# EAGLE board MCDB (EAGLE 9.4.2)
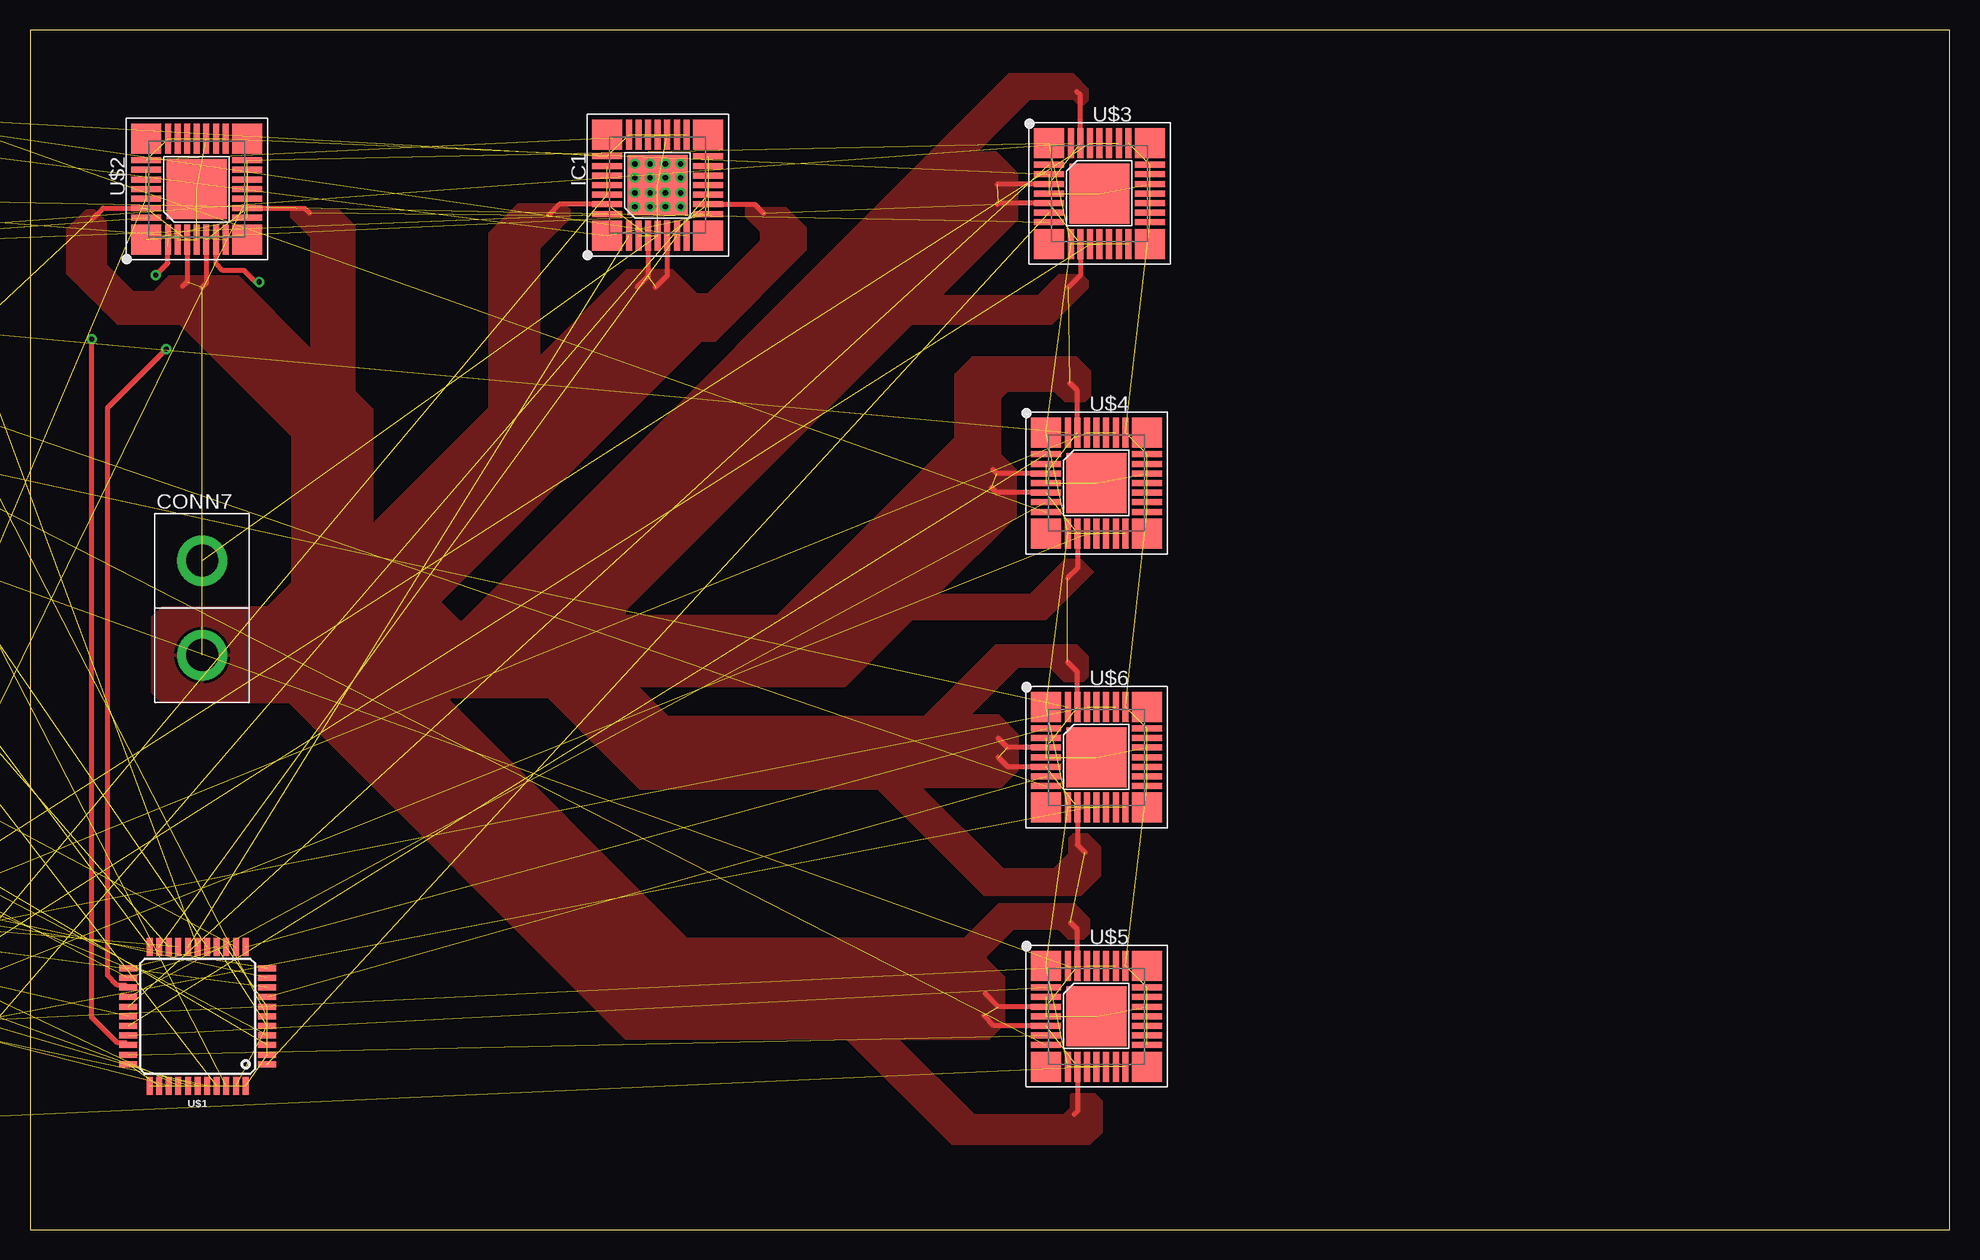
[diagram p0: board, top side]
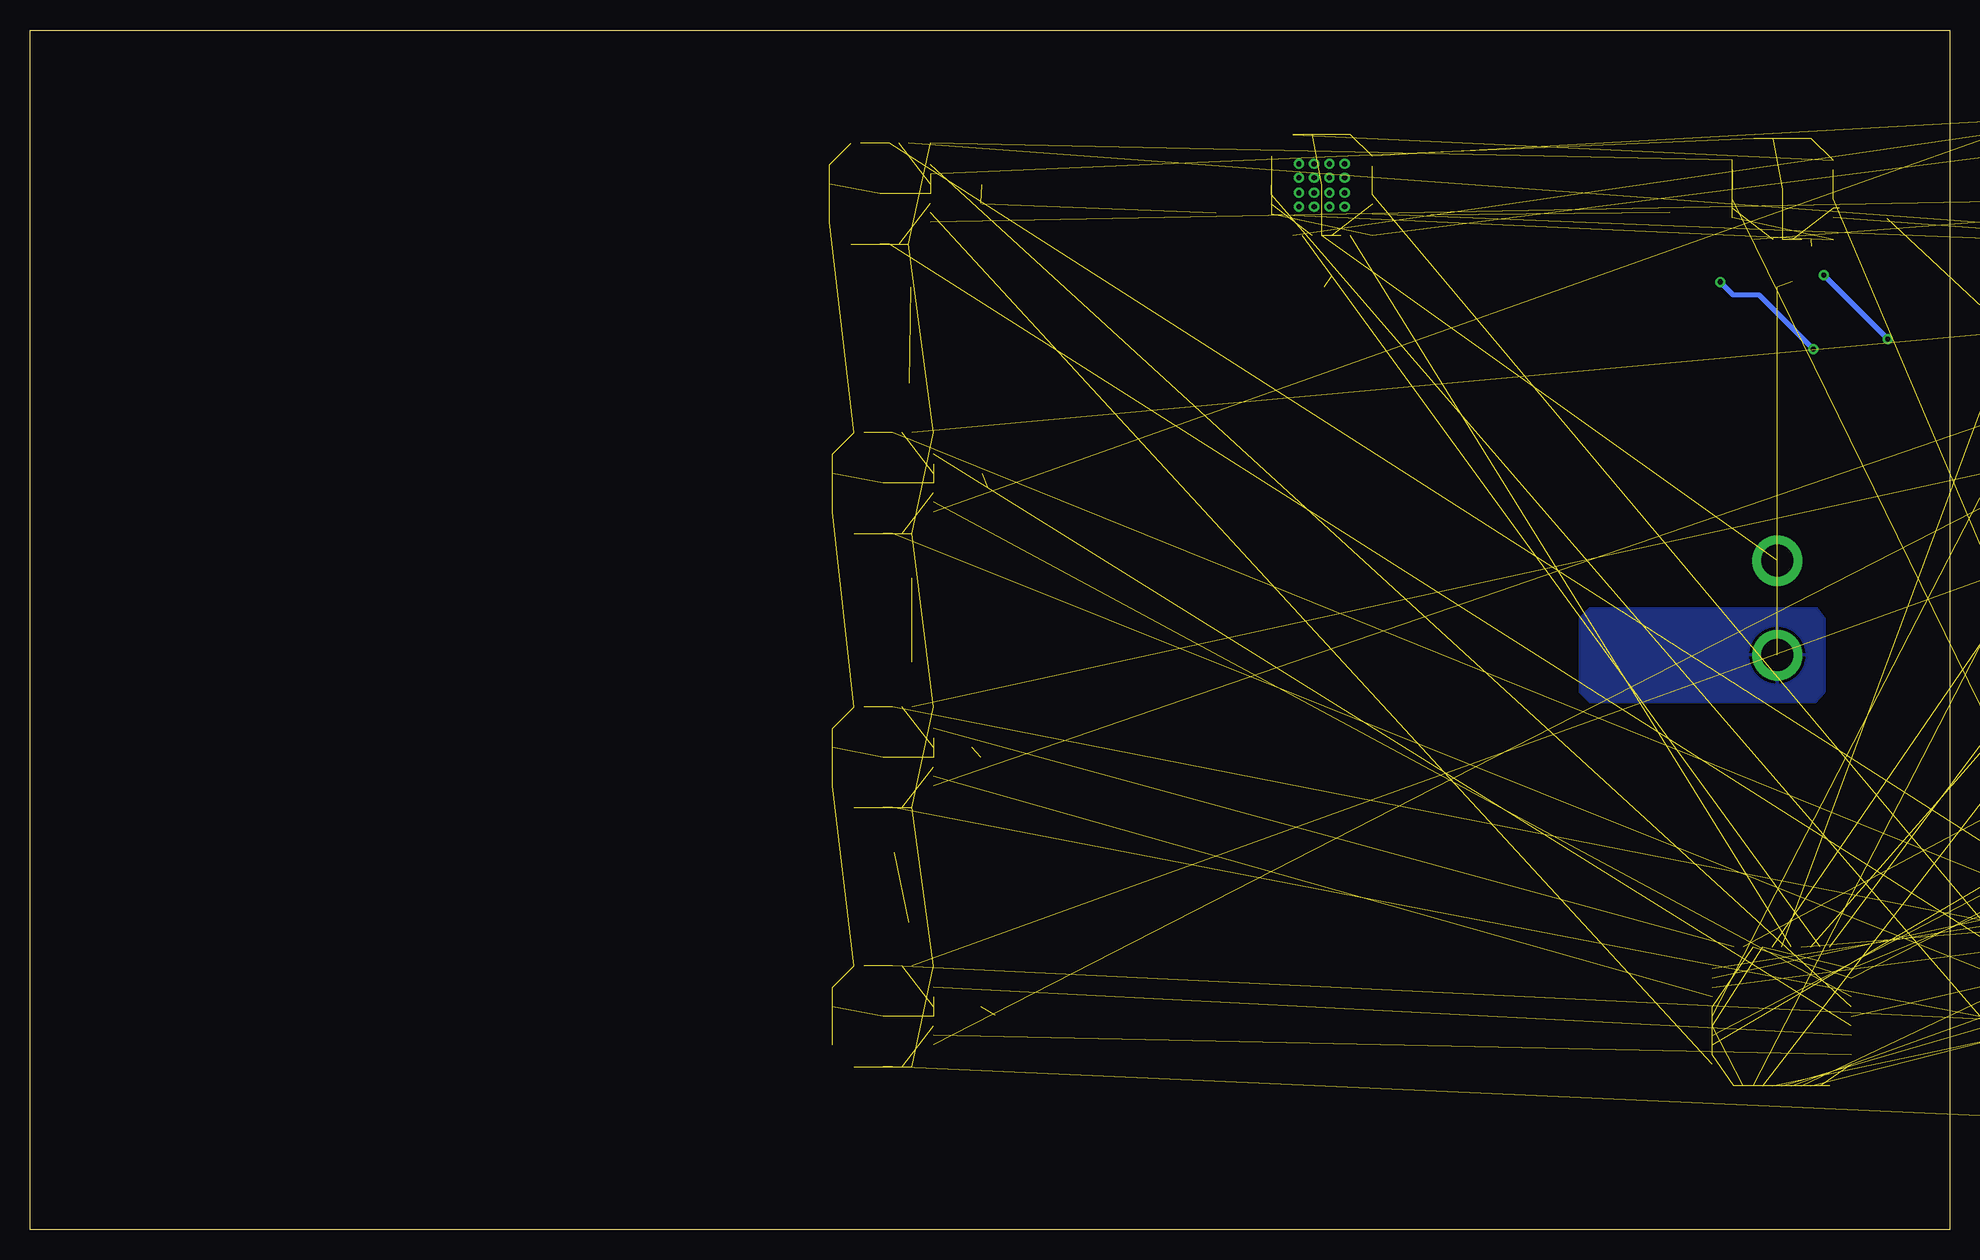
[diagram p1: board, bottom side, seen from below]

Size 160 x 100 mm. Coordinates in mm from the lower left corner, seen from the top.
Outline: 0,0 160,0 160,100 0,100 0,0
Copper layers (1*16): Top 0.035mm / dielectric 1.5mm / Bottom 0.035mm
Design rules "default": minimum track width 6mil, minimum drill 0.35mm, track to track 6mil, track to pad 6mil, pad to pad 6mil, via to via 6mil, smd to smd 6mil, copper to edge 40mil, drill to drill 6mil, minimum pad ring 10mil, minimum via ring 8mil, stop-mask expansion 4mil, vias tented up to drill 0mil, thermal gap 10mil

## Footprints (pad centres in the part's own frame; a part is rotated, then mirrored left to right if it is on the bottom)
0603-CAP = smd 1.1 x 1: 1 -0.85,0; 2 0.85,0
.248"CAP_THRU = drill 0.8: MINUS 0,0; PLUS 2.5,0
ANDERSON_VERTICAL = drill 2.667 pad 4.191: PIN1 0,-3.937; PIN2 0,3.937
1X04-MTA = drill 1.016 pad 1.88: 1 -3.81,0; 2 -1.27,0; 3 1.27,0; 4 3.81,0
PQFN-32 = smd 2.5 x 2.5: 1 -4.2,4.2; 9 -4.2,-4.2; 17 4.2,-4.2; 25 4.2,4.2 | smd 2.5 x 0.5: 2 -4.2,2.4; 3 -4.2,1.6; 4 -4.2,0.8; 5 -4.2,0; 6 -4.2,-0.8; 7 -4.2,-1.6; 8 -4.2,-2.4; 18 4.2,-2.4; 19 4.2,-1.6; 20 4.2,-0.8; 21 4.2,0; 22 4.2,0.8; 23 4.2,1.6; 24 4.2,2.4 | smd 0.5 x 2.5: 10 -2.4,-4.2; 11 -1.6,-4.2; 12 -0.8,-4.2; 13 0,-4.2; 14 0.8,-4.2; 15 1.6,-4.2; 16 2.4,-4.2; 26 2.4,4.2; 27 1.6,4.2; 28 0.8,4.2; 29 0,4.2; 30 -0.8,4.2; 31 -1.6,4.2; 32 -2.4,4.2 | smd 5 x 5: MID 0,0
USB-B-PTH = drill 0.914 pad 1.676: D+ 4,1.25; D- 5.981,1.25; GND 4,-1.25; VBUS 5.981,-1.25 | drill 2.286: SHLD1 1.282,-6.02; SHLD2 1.282,6.02
LED-1206 = smd 1.2 x 1.4: A -1.5,0; C 1.5,0
4X-0603 = smd 0.65 x 0.8: 1 0,-0.05; 4 2.55,-0.05; 5 2.55,1.65; 8 0,1.65 | smd 0.55 x 0.8: 2 0.875,-0.05; 3 1.675,-0.05; 6 1.675,1.65; 7 0.875,1.65
R0603 = smd 1 x 1.1: 1 -0.85,0; 2 0.85,0
TQFP44 = smd 1.5 x 0.5: 1 -5.8,4; 2 -5.8,3.2; 3 -5.8,2.4; 4 -5.8,1.6; 5 -5.8,0.8; 6 -5.8,0; 7 -5.8,-0.8; 8 -5.8,-1.6; 9 -5.8,-2.4; 10 -5.8,-3.2; 11 -5.8,-4; 23 5.8,-4; 24 5.8,-3.2; 25 5.8,-2.4; 26 5.8,-1.6; 27 5.8,-0.8; 28 5.8,0; 29 5.8,0.8; 30 5.8,1.6; 31 5.8,2.4; 32 5.8,3.2; 33 5.8,4 | smd 0.5 x 1.5: 12 -4,-5.8; 13 -3.2,-5.8; 14 -2.4,-5.8; 15 -1.6,-5.8; 16 -0.8,-5.8; 17 0,-5.8; 18 0.8,-5.8; 19 1.6,-5.8; 20 2.4,-5.8; 21 3.2,-5.8; 22 4,-5.8; 34 4,5.8; 35 3.2,5.8; 36 2.4,5.8; 37 1.6,5.8; 38 0.8,5.8; 39 0,5.8; 40 -0.8,5.8; 41 -1.6,5.8; 42 -2.4,5.8; 43 -3.2,5.8; 44 -4,5.8
USB-MICRO-AB-VERT = drill 0.5 pad 0.7: P$1 -1.3,0.5; P$2 -0.65,-0.5; P$3 0,0.5; P$4 0.65,-0.5; P$5 1.3,0.5 | drill 1.175: P$6 -3.575,0.28; P$7 3.575,0.28
CRYSTAL-SMD-7.6X4.1-2PIN = smd 5.5 x 1.5: P$1 0,0; P$2 7.8,0

## Placement (x,y rotation side)
C1  33 nF  [0603-CAP]  -48.26,80.01 0 top  (outside the outline)
C2  100 nF  [0603-CAP]  -78.74,71.12 0 top  (outside the outline)
C3  1 uF  [0603-CAP]  -34.29,86.36 0 top  (outside the outline)
C4  100 uF  [.248"CAP_THRU]  -24.13,58.42 0 top  (outside the outline)
C5  33 nF  [0603-CAP]  -54.61,80.01 0 top  (outside the outline)
C6  100 nF  [0603-CAP]  -11.43,80.01 0 top  (outside the outline)
C7  1 uF  [0603-CAP]  -39.37,86.36 0 top  (outside the outline)
C8  100 uF  [.248"CAP_THRU]  -33.02,58.42 0 top  (outside the outline)
C9  33 nF  [0603-CAP]  -60.96,80.01 0 top  (outside the outline)
C10  100 nF  [0603-CAP]  -19.05,80.01 0 top  (outside the outline)
C11  1 uF  [0603-CAP]  -44.45,86.36 0 top  (outside the outline)
C12  100 uF  [.248"CAP_THRU]  -41.91,58.42 0 top  (outside the outline)
C13  33 nF  [0603-CAP]  -67.31,80.01 0 top  (outside the outline)
C14  100 nF  [0603-CAP]  -26.67,80.01 0 top  (outside the outline)
C15  1 uF  [0603-CAP]  -49.53,86.36 0 top  (outside the outline)
C16  100 uF  [.248"CAP_THRU]  -50.8,58.42 0 top  (outside the outline)
C17  33 nF  [0603-CAP]  -73.66,80.01 0 top  (outside the outline)
C18  100 nF  [0603-CAP]  -34.29,80.01 0 top  (outside the outline)
C19  1 uF  [0603-CAP]  -54.61,86.36 0 top  (outside the outline)
C20  100 uF  [.248"CAP_THRU]  -59.69,58.42 0 top  (outside the outline)
C21  33 nF  [0603-CAP]  -80.01,80.01 0 top  (outside the outline)
C22  100 nF  [0603-CAP]  -41.91,80.01 0 top  (outside the outline)
C23  1 uF  [0603-CAP]  -59.69,86.36 0 top  (outside the outline)
C24  100 uF  [.248"CAP_THRU]  -68.58,58.42 0 top  (outside the outline)
C25  22 pF  [0603-CAP]  -10.16,86.36 0 top  (outside the outline)
C26  22pF  [0603-CAP]  -29.21,86.36 0 top  (outside the outline)
C27  .1 uF  [0603-CAP]  -22.86,86.36 0 top  (outside the outline)
C28  1 uF  [0603-CAP]  -64.77,86.36 0 top  (outside the outline)
C29  [0603-CAP]  -49.53,91.44 0 top  (outside the outline)
C30  [0603-CAP]  -54.61,91.44 0 top  (outside the outline)
C31  [0603-CAP]  -59.69,91.44 0 top  (outside the outline)
C32  [0603-CAP]  -64.77,91.44 0 top  (outside the outline)
C33  [0603-CAP]  -69.85,91.44 0 top  (outside the outline)
C34  [0603-CAP]  -74.93,91.44 0 top  (outside the outline)
C35  [0603-CAP]  -80.01,91.44 0 top  (outside the outline)
C36  [0603-CAP]  -85.09,91.44 0 top  (outside the outline)
C37  [.248"CAP_THRU]  -11.43,71.12 0 top  (outside the outline)
C38  [.248"CAP_THRU]  -20.32,71.12 0 top  (outside the outline)
C39  [.248"CAP_THRU]  -29.21,71.12 0 top  (outside the outline)
CONN1  ANDERSONVERTICAL  [ANDERSON_VERTICAL]  -11.43,11.43 0 top  (outside the outline)
CONN2  ANDERSONVERTICAL  [ANDERSON_VERTICAL]  -20.32,11.43 0 top  (outside the outline)
CONN3  ANDERSONVERTICAL  [ANDERSON_VERTICAL]  -29.21,11.43 0 top  (outside the outline)
CONN4  ANDERSONVERTICAL  [ANDERSON_VERTICAL]  -38.1,11.43 0 top  (outside the outline)
CONN5  ANDERSONVERTICAL  [ANDERSON_VERTICAL]  -46.99,11.43 0 top  (outside the outline)
CONN6  ANDERSONVERTICAL  [ANDERSON_VERTICAL]  -55.88,11.43 0 top  (outside the outline)
CONN7  ANDERSONVERTICAL  [ANDERSON_VERTICAL]  14.35,51.82 0 top
ENCODER  [1X04-MTA]  -27.94,30.48 0 top  (outside the outline)
ENCODER1  [1X04-MTA]  -39.37,30.48 0 top  (outside the outline)
ENCODER2  [1X04-MTA]  -50.8,30.48 0 top  (outside the outline)
ENCODER3  [1X04-MTA]  -62.23,30.48 0 top  (outside the outline)
ENCODER4  [1X04-MTA]  -73.66,30.48 0 top  (outside the outline)
ENCODER5  [1X04-MTA]  -12.7,46.99 0 top  (outside the outline)
IC1  MC33926  [PQFN-32]  52.32,87.06 90 top
J1  USB_B_PTH  [USB-B-PTH]  -13.97,30.48 0 top  (outside the outline)
LED1  GREEN  [LED-1206]  -45.72,72.39 0 top  (outside the outline)
LED4  RED  [LED-1206]  -60.96,72.39 0 top  (outside the outline)
LED5  YELLOW  [LED-1206]  -38.1,72.39 0 top  (outside the outline)
LED6  GREEN  [LED-1206]  -53.34,72.39 0 top  (outside the outline)
R1  10k  [4X-0603]  -30.48,91.44 0 top  (outside the outline)
R3  200  [R0603]  -80.01,86.36 0 top  (outside the outline)
R4  >VALUE  [R0603]  -71.12,71.12 0 top  (outside the outline)
R5  200  [R0603]  -85.09,86.36 0 top  (outside the outline)
R6  10k  [4X-0603]  -35.56,91.44 0 top  (outside the outline)
R7  200  [R0603]  -8.89,92.71 0 top  (outside the outline)
R8  330  [4X-0603]  -40.64,91.44 0 top  (outside the outline)
R9  200  [R0603]  -13.97,92.71 0 top  (outside the outline)
R11  200  [R0603]  -69.85,86.36 0 top  (outside the outline)
R12  10k  [4X-0603]  -45.72,91.44 0 top  (outside the outline)
R13  200  [R0603]  -74.93,86.36 0 top  (outside the outline)
U$1  32U4  [TQFP44]  13.97,17.78 180 top
U$2  MC33926  [PQFN-32]  13.91,86.74 90 top
U$3  MC33926  [PQFN-32]  89.15,86.36 0 top
U$4  MC33926  [PQFN-32]  88.9,62.23 0 top
U$5  MC33926  [PQFN-32]  88.9,17.78 0 top
U$6  MC33926  [PQFN-32]  88.9,39.37 0 top
UCAP  1 uF  [0603-CAP]  -16.51,86.36 0 top  (outside the outline)
USB1  USB-OTGMICRO-AB-VERT  [USB-MICRO-AB-VERT]  -21.59,91.44 0 top  (outside the outline)
Y1  16MHz  [CRYSTAL-SMD-7.6X4.1-2PIN]  -83.82,57.15 0 top  (outside the outline)

## Library data of the parts
C1-C3 C5-C7 C9-C11 C13-C15 C17-C19 C21-C23 C25-C36 UCAP = pie; PIE-INT-REF-NUM: CAPACITOR-GENERIC
C4 C8 C12 C16 C20 C24 C37-C39 IC1 R1 R6 R8 R12 U$2-U$6 Y1 = pie
CONN1-CONN7 = pie; PIE-INT-REF-NUM: Anderson
ENCODER ENCODER1-ENCODER5 = pie; PIE-INT-REF-NUM: MTA
J1 = SparkFun-Connectors; PROD_ID: CONN-08278; SF_ID: PRT-00139
LED1 LED4-LED6 = pie; PIE-INT-REF-NUM: LED
R3-R5 R7 R9 R11 R13 = pie; DESCRIPTION: RESISTOR, American symbol; DISTRIBUTOR: DigiKey; MANUFACTURER: Rohm Semiconductor; NOTES: Cut Tape; PACKAGE: R0603
U$1 = pie; PROD_ID: IC-11161
USB1 = pie; PIE-DIGIKEY-PN: 732-5959-1-ND

## Nets
A1: ENCODER3.3 R1.5 U$1.36
A2: ENCODER.3 R1.7 U$1.37
A3: ENCODER1.3 R6.5 U$1.38
A4: ENCODER2.3 R6.7 U$1.39
A5: ENCODER4.3 R12.5 U$1.40
A6: ENCODER5.3 R12.7 U$1.41
B1: ENCODER3.4 R1.6 U$1.9
B2: ENCODER.4 R1.8 U$1.10
B3: ENCODER1.4 R6.6 U$1.11
B4: ENCODER2.4 R6.8 U$1.28
B5: ENCODER4.4 R12.6 U$1.19
B6: ENCODER5.4 R12.8 U$1.20
CCP: C1.1 U$2.32
CCP1: C5.1 U$3.32
CCP3: C13.1 IC1.32
D+: C29.2 J1.D+ U$1.4 USB1.P$3
D-: C30.2 J1.D- U$1.3 USB1.P$2
FB1: C15.2 IC1.8 R9.2
FB2: C3.2 R3.2 U$2.8
FB3: C7.2 R5.2 U$3.8
FB4: C11.2 R7.2 U$4.8
FB5: C19.2 R11.2 U$5.8
FB6: C23.2 R13.2 U$6.8
GND: C2.1 C3.1 C4.MINUS C6.1 C7.1 C8.MINUS C10.1 C11.1 C12.MINUS C14.1 C15.1 C16.MINUS C18.1 C19.1 C20.MINUS C22.1 C23.1 C24.MINUS C25.1 C26.1 C27.1 C28.1 C29.1 C30.1 C31.1 C32.1 C33.1 C34.1 C35.1 C36.1 C37.MINUS C38.MINUS C39.MINUS CONN7.PIN2 ENCODER1.2 ENCODER2.2 ENCODER3.2 ENCODER4.2 ENCODER5.2 ENCODER.2 IC1.3 IC1.5 IC1.18 IC1.19 IC1.20 IC1.22 IC1.23 IC1.24 IC1.26 IC1.MID J1.GND R3.1 R5.1 R7.1 R8.2 R8.3 R8.4 R9.1 R11.1 R13.1 U$1.5 U$1.15 U$1.23 U$1.33 U$1.35 U$1.43 U$2.3 U$2.5 U$2.18 U$2.19 U$2.20 U$2.22 U$2.23 U$2.24 U$2.26 U$2.MID U$3.3 U$3.5 U$3.18 U$3.19 U$3.20 U$3.22 U$3.23 U$3.24 U$3.26 U$3.MID U$4.3 U$4.5 U$4.18 U$4.19 U$4.20 U$4.22 U$4.23 U$4.24 U$4.26 U$4.MID U$5.3 U$5.5 U$5.18 U$5.19 U$5.20 U$5.22 U$5.23 U$5.24 U$5.26 U$5.MID U$6.3 U$6.5 U$6.18 U$6.19 U$6.20 U$6.22 U$6.23 U$6.24 U$6.26 U$6.MID UCAP.1 USB1.P$5 USB1.P$6 USB1.P$7
INV1: IC1.7 U$1.21
INV2: U$1.25 U$2.7
INV3: U$1.1 U$3.7
INV4: U$1.26 U$4.7
INV5: U$1.32 U$5.7
INV6: U$1.8 U$6.7
LED1: LED4.A
LED2: LED5.A
LED3: LED6.A
N$1: C21.1 U$6.32
N$2: R1.3
N$3: R1.4
N$4: LED4.C R8.5
N$5: LED6.C R8.7
N$6: C5.2 C6.2 C8.PLUS
N$7: LED5.C R8.6
N$8: C17.1 U$5.32
N$9: R6.3
N$10: R6.4
N$11: IC1.21
N$12: LED1.C R8.8
N$14: R12.3
N$15: R12.4
N$16: U$1.6 UCAP.2
N$17: C25.2 U$1.17 Y1.P$2
N$18: C26.2 U$1.16 Y1.P$1
N$19: C27.2 U$1.42
N$20: C9.1 U$4.32
N$21: R4.1 U$1.13
OUT1: CONN1.PIN1 IC1.12 IC1.13 IC1.14 IC1.15
OUT2: CONN1.PIN2 IC1.27 IC1.28 IC1.29 IC1.30
OUT3: CONN2.PIN1 U$2.12 U$2.13 U$2.14 U$2.15
OUT4: CONN2.PIN2 U$2.27 U$2.28 U$2.29 U$2.30
OUT5: CONN3.PIN1 U$3.12 U$3.13 U$3.14 U$3.15
OUT6: CONN3.PIN2 U$3.27 U$3.28 U$3.29 U$3.30
OUT7: CONN4.PIN1 U$4.12 U$4.13 U$4.14 U$4.15
OUT8: CONN4.PIN2 U$4.27 U$4.28 U$4.29 U$4.30
OUT9: CONN5.PIN1 U$5.12 U$5.13 U$5.14 U$5.15
OUT10: CONN5.PIN2 U$5.27 U$5.28 U$5.29 U$5.30
OUT11: CONN6.PIN1 U$6.12 U$6.13 U$6.14 U$6.15
OUT12: CONN6.PIN2 U$6.27 U$6.28 U$6.29 U$6.30
PD5: R8.1 U$1.22
PWM1: IC1.2 U$1.18
PWM2: U$1.31 U$2.2
PWM3: U$1.27 U$3.2
PWM4: U$1.29 U$4.2
PWM5: U$1.30 U$5.2
PWM6: U$1.12 U$6.2
VCC: C28.2 C31.2 C32.2 C33.2 C34.2 C35.2 C36.2 ENCODER1.1 ENCODER2.1 ENCODER3.1 ENCODER4.1 ENCODER5.1 ENCODER.1 IC1.1 IC1.10 IC1.16 J1.VBUS LED1.A R1.1 R1.2 R4.2 R6.1 R6.2 R12.1 R12.2 U$1.2 U$1.7 U$1.14 U$1.24 U$1.34 U$1.44 U$2.1 U$2.10 U$2.16 U$3.1 U$3.10 U$3.16 U$4.1 U$4.10 U$4.16 U$5.1 U$5.10 U$5.16 U$6.1 U$6.10 U$6.16 USB1.P$1
VPWR: C1.2 C2.2 C4.PLUS C9.2 C10.2 C12.PLUS C13.2 C14.2 C16.PLUS C17.2 C18.2 C20.PLUS C21.2 C22.2 C24.PLUS C37.PLUS C38.PLUS C39.PLUS CONN7.PIN1 IC1.4 IC1.6 IC1.11 IC1.31 U$2.4 U$2.6 U$2.11 U$2.31 U$3.4 U$3.6 U$3.11 U$3.31 U$4.4 U$4.6 U$4.11 U$4.31 U$5.4 U$5.6 U$5.11 U$5.31 U$6.4 U$6.6 U$6.11 U$6.31

## Tracks (layer width: path | path; a pad name or v marks a point on that pad's centre or on a via)
A1  (2 unrouted)
A2  (2 unrouted)
A3  (2 unrouted)
A4  (2 unrouted)
A5  (2 unrouted)
A6  (2 unrouted)
B1  (2 unrouted)
B2  (2 unrouted)
B3  (2 unrouted)
B4  (2 unrouted)
B5  (2 unrouted)
B6  (2 unrouted)
CCP  (1 unrouted)
CCP1  (1 unrouted)
CCP3  (1 unrouted)
D+  (3 unrouted)
D-  (3 unrouted)
FB1  (2 unrouted)
FB2  (2 unrouted)
FB3  (2 unrouted)
FB4  (2 unrouted)
FB5  (2 unrouted)
FB6  (2 unrouted)
GND  (119 unrouted)
INV1  (1 unrouted)
INV2  (via drill 0.43)
  Top 0.406: U$1.25 7.98,20.37 7.27,20.37 6.48,21.17 6.48,68.52 v11.37,73.41 | v19.11,78.99 18.8,78.99 17.84,79.95 16.07,79.95 15.51,80.5 U$2.7
  Bottom 0.406: v11.37,73.41 15.88,77.92 18.03,77.92 v19.11,78.99 19.18,79.06
INV3  (1 unrouted)
INV4  (1 unrouted)
INV5  (1 unrouted)
INV6  (1 unrouted)
N$1  (1 unrouted)
N$4  (1 unrouted)
N$5  (1 unrouted)
N$6  (2 unrouted)
N$7  (1 unrouted)
N$8  (1 unrouted)
N$12  (1 unrouted)
N$13  (via drill 0.43)
  other vias: 50.42,88.84
N$16  (1 unrouted)
N$17  (2 unrouted)
N$18  (2 unrouted)
N$19  (1 unrouted)
N$20  (1 unrouted)
N$21  (1 unrouted)
N$22  (via drill 0.43)
  other vias: 51.69,88.84
N$23  (via drill 0.43)
  other vias: 52.96,88.84
N$24  (via drill 0.43)
  other vias: 54.23,88.84
N$25  (via drill 0.43)
  other vias: 50.42,87.69
N$26  (via drill 0.43)
  other vias: 51.69,87.69
N$27  (via drill 0.43)
  other vias: 52.96,87.69
N$28  (via drill 0.43)
  other vias: 54.23,87.69
N$29  (via drill 0.43)
  other vias: 50.42,86.42
N$30  (via drill 0.43)
  other vias: 51.69,86.42
N$31  (via drill 0.43)
  other vias: 52.96,86.42
N$32  (via drill 0.43)
  other vias: 54.23,86.42
N$33  (via drill 0.43)
  other vias: 50.42,85.28
N$34  (via drill 0.43)
  other vias: 51.69,85.28
N$35  (via drill 0.43)
  other vias: 52.96,85.28
N$36  (via drill 0.43)
  other vias: 54.23,85.28
OUT1  (4 unrouted)
OUT2  (4 unrouted)
OUT3  (4 unrouted)
OUT4  (4 unrouted)
OUT5  (4 unrouted)
OUT6  (4 unrouted)
OUT7  (4 unrouted)
OUT8  (4 unrouted)
OUT9  (4 unrouted)
OUT10  (4 unrouted)
OUT11  (4 unrouted)
OUT12  (4 unrouted)
PD5  (1 unrouted)
PWM1  (1 unrouted)
PWM2  (via drill 0.43)  (1 unrouted)
  Top 0.406: U$1.31 7.98,15.57 7.27,15.57 5.14,17.7 v5.14,74.23 | v10.48,79.57 11.49,80.58 11.49,81.98
  Bottom 0.406: v5.14,74.23 v10.48,79.57
PWM3  (1 unrouted)
PWM4  (1 unrouted)
PWM5  (1 unrouted)
PWM6  (1 unrouted)
VCC  (46 unrouted)
VPWR  (43 unrouted)
  Top 0.406: 23.3,84.77 23.29,84.76 22.91,85.14 U$2.11 | U$3.31 87.55,94.56 87.25,94.87 | U$3.4 80.68,87.16 80.64,87.12 | U$3.6 80.73,85.56 80.64,85.47 | U$3.11 87.55,79.55 86.55,78.55 | U$4.31 87.3,69.93 86.68,70.55 | U$4.4 80.61,63.03 80.26,63.37 | U$4.6 80.56,61.43 80.14,61.85 | U$4.11 87.3,55.1 86.49,54.29 | U$6.31 87.3,46.49 86.49,47.31 | U$6.4 81.5,40.17 80.71,40.96 | U$6.6 81.51,38.57 80.71,39.37 | U$6.11 87.3,32.08 87.95,31.43 | U$5.31 87.3,25.03 86.74,25.59 | U$5.4 80.73,18.58 79.63,19.68 | U$5.6 80.36,16.98 79.5,17.84 | U$5.11 87.3,9.83 87.06,9.59 | U$2.4 13.11,79.02 12.7,78.61 | U$2.6 14.71,78.91 14.35,78.55 | 9.21,85.15 6.1,85.15 5.21,84.26 | IC1.6 53.12,79.54 52.13,78.55 | IC1.4 51.52,79.46 50.61,78.55 | IC1.31 44.12,85.46 43.24,84.58 | IC1.11 60.4,85.46 61.15,84.71
  pour Bottom (rank 2): 10.41,50.93 10.41,44.83 11.18,43.94 29.97,43.94 30.86,44.83 30.86,50.93 29.97,51.82 11.05,51.82
  pour Top: 19.81,51.94 21.84,53.98 21.84,66.1 12.51,75.44 7.3,75.44 3.05,79.69 3.05,83.38 4.7,85.03 5.33,85.03 6.35,84.01 6.35,80.45 8.57,78.23 10.35,78.23 11.62,79.5 17.34,79.5 23.43,73.41 23.43,82.68 21.72,84.39 21.72,84.96 21.78,85.03 25.72,85.03 27.05,83.69 27.05,69.91 28.57,68.39 28.57,58.8 38.29,68.52 38.29,83.12 40.7,85.53 44.51,85.53 45.02,85.03 45.02,84.33 42.48,81.79 42.48,72.77 49.78,80.07 53.53,80.07 55.56,78.04 56.52,78.04 60.9,82.42 60.9,83.19 59.63,84.45 59.63,85.15 59.69,85.22 62.99,85.22 64.71,83.5 64.71,81.66 57.09,74.04 55.94,74.04 34.23,52.32 35.81,50.74 36,50.74 81.66,96.39 86.93,96.39 88.2,95.12 88.2,94.11 87.82,93.73 87.44,93.73 87,94.17 83.31,94.17 78.99,89.85 80.52,89.85 82.3,88.07 82.3,84.2 76.01,77.91 84.07,77.91 85.79,79.63 87.69,79.63 88.2,79.12 88.2,78.49 85.15,75.44 73.47,75.44 49.59,51.56 49.59,51.31 49.66,51.24 62.29,51.24 77.09,66.04 77.09,71.31 78.55,72.77 87.19,72.77 88.39,71.56 88.39,69.47 87.88,68.96 86.3,68.96 85.41,69.85 81.47,69.85 80.9,69.28 80.9,64.64 82.17,63.37 82.17,59.44 75.69,52.96 83.38,52.96 86.3,55.88 87.57,55.88 88.65,54.8 84.65,50.8 73.53,50.8 67.94,45.21 50.86,45.21 50.8,45.15 53.15,42.8 74.55,42.8 80.52,48.77 87.25,48.77 88.2,47.82 88.2,46.1 87.76,45.66 86.23,45.66 85.03,46.86 82.36,46.86 78.42,42.93 80.71,42.93 82.36,41.27 82.36,38.29 80.9,36.83 74.36,36.83 81.09,30.1 85.34,30.1 86.61,31.37 86.61,32.64 87,33.02 88.14,33.02 89.22,31.94 89.22,29.46 87.57,27.81 79.57,27.81 70.68,36.7 50.86,36.7 43.24,44.32 35.12,44.32 34.92,44.13 54.74,24.32 77.91,24.32 80.77,27.18 87.06,27.18 88.33,25.91 88.33,24.7 87.82,24.19 86.55,24.19 85.72,25.02 81.98,25.02 79.69,22.73 79.69,22.61 81.22,21.08 81.22,17.14 79.88,15.81 72.45,15.81 78.68,9.59 86.17,9.59 86.74,10.16 86.74,11.24 86.87,11.37 88.71,11.37 89.34,10.73 89.34,8.06 88.33,7.05 76.9,7.05 68.07,15.88 49.66,15.88 21.65,43.88 11.05,43.88 10.16,44.77 10.16,51.05 11.05,51.94